# Altium PCB 15W-Dual-Transmitter.PcbDoc
Units mil, origin at the board's own origin, x right, y up, seen from the top; angles counter-clockwise.
Board outline 2362.2 x 1574.8 mil, 2 copper layers (Top Layer, Bottom Layer), stack 61.811 mil thick; 60 components, 45 nets, 203 pads, 210 vias.
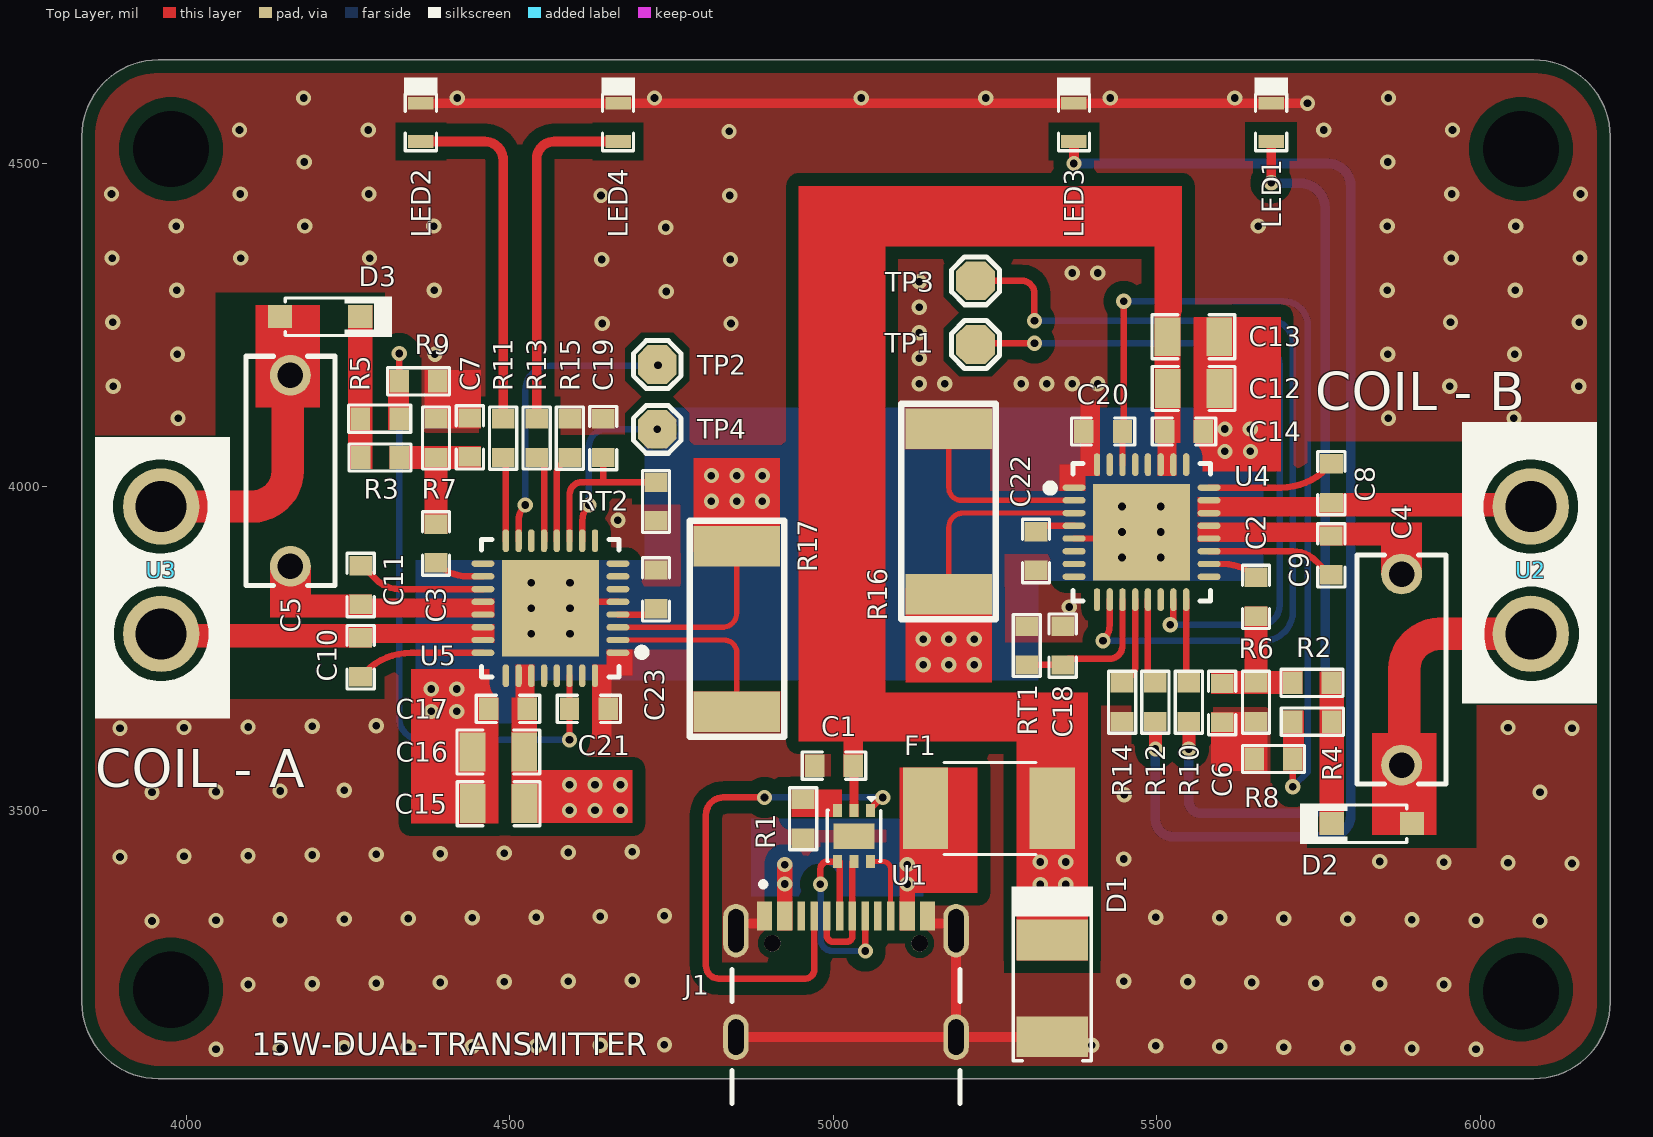
[diagram p0: Top Layer view]
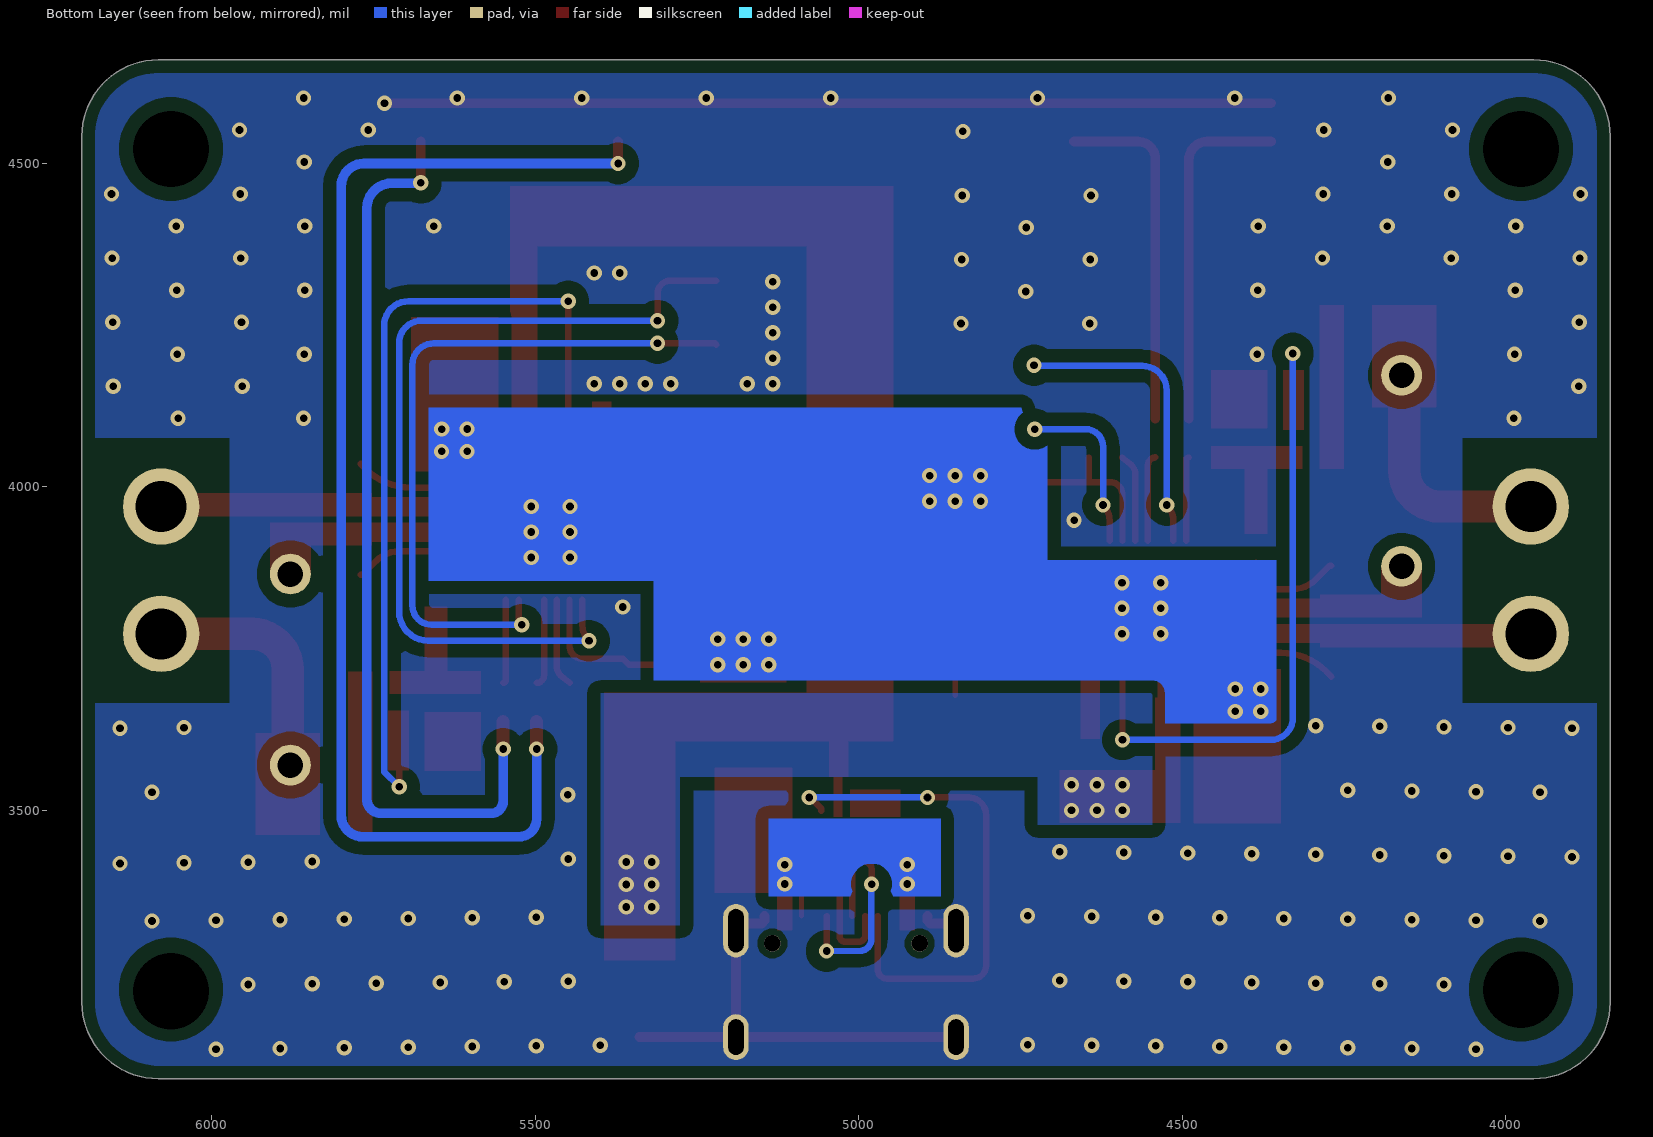
[diagram p1: Bottom Layer view, seen from below]
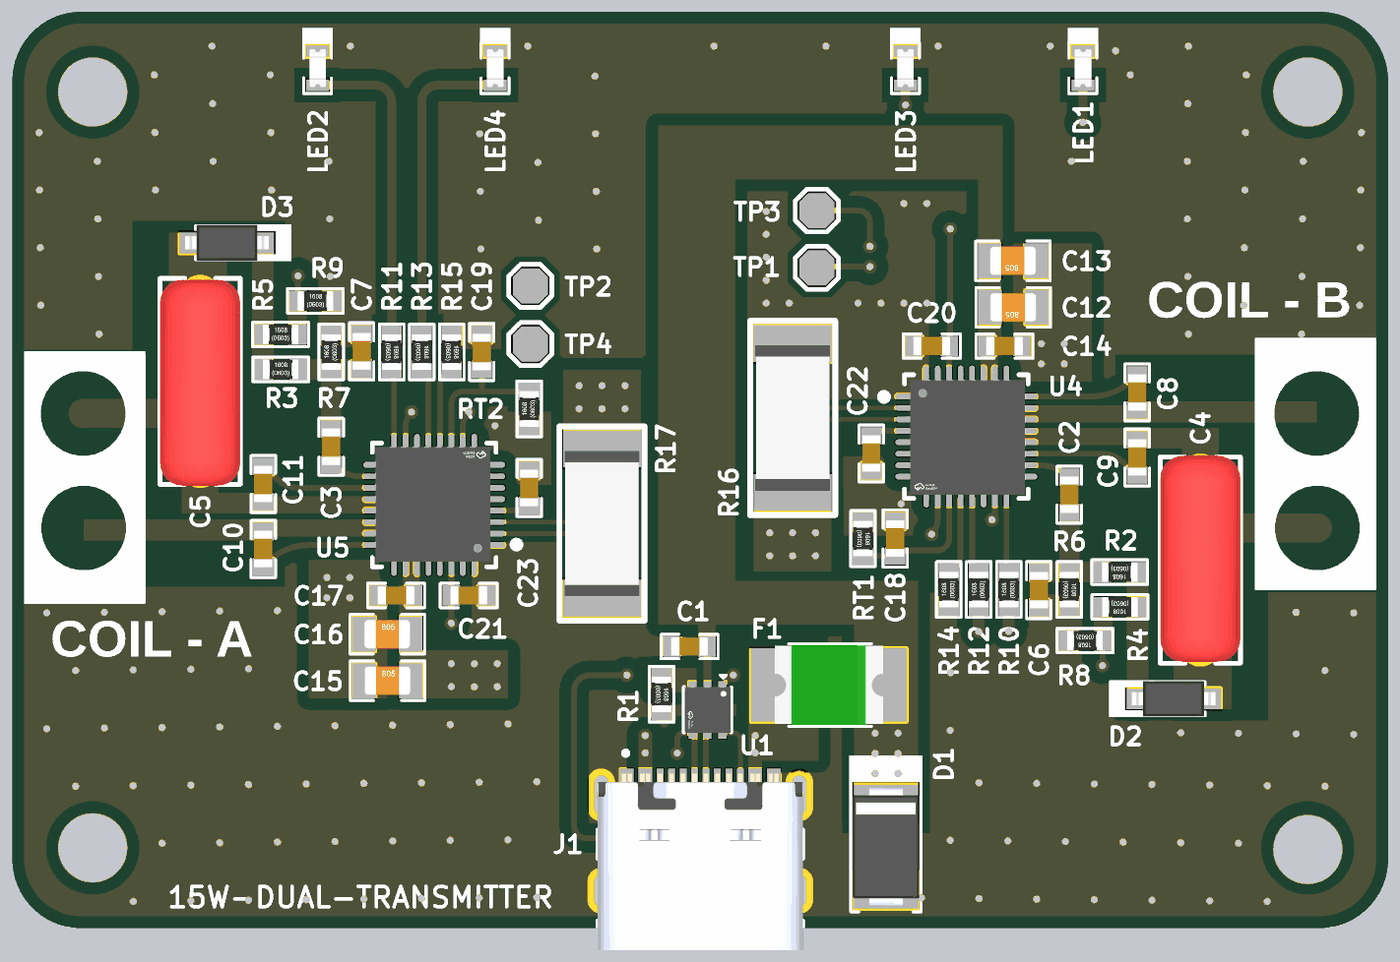
[diagram p2: 3D render of the assembled board from above, using the file's embedded part models]

## Layer stack, top to bottom
Top Solder: solder mask 0.4, Solder Resist, Dk 3.5
Top Layer: signal copper 1.378
Dielectric 1: dielectric 59.055, FR-4, Dk 4.8
Bottom Layer: signal copper 1.378
Bottom Solder: solder mask 0.4, Solder Resist, Dk 3.5

## Board outline
3838.58,3203.4 3838.58,4541.98 cw(c3956.69,4541.98) 3956.69,4660.09 6082.68,4660.09 cw(c6082.68,4541.98) 6200.79,4541.98 6200.79,3203.4 cw(c6082.68,3203.4) 6082.68,3085.29 3956.69,3085.29 cw(c3956.69,3203.4)

## Design rules (kind name [scope] priority, off if disabled: settings)
BoardOutlineClearance [All] p1: gap=0 ignorepadtopadclearanceinfootprint=FALSE except(20: Poly-OutlineEdge)
Clearance Clearance_USB [InDifferentialPairClass('USB_DIFF_Lines')] p1: gap=10 ignorepadtopadclearanceinfootprint=TRUE except(0: Arc-Hole Track-Hole SMDPad-Hole THPad-Hole Via-Hole Fill-Hole Poly-Hole Region-Hole Text-Hole; 7: Arc-Arc Arc-Track Arc-SMDPad Arc-Region Track-Track Track-SMDPad Track-Region SMDPad-Region THPad-Region Via-Region Fill-Region Poly-Region Region-Region; 20: Arc-Poly Track-Poly SMDPad-Poly THPad-Poly Via-Poly Fill-Poly Poly-Poly)
Clearance [All] p2: gap=10 ignorepadtopadclearanceinfootprint=TRUE except(7: Arc-Region Track-Region SMDPad-Fill SMDPad-Region THPad-Region Via-Region Fill-Region Fill-Hole Region-Region Region-Hole; 8: Arc-Track Arc-Via Arc-Fill Track-Track Track-SMDPad Track-Via Track-Fill Track-Hole Fill-Fill; 20: Arc-Poly Track-Poly SMDPad-Poly THPad-Poly Via-Poly Fill-Poly Poly-Poly Poly-Region)
ComponentClearance [All] p1: gap=0 collisioncheckmode=3 verticalgap=0 showdistances=FALSE
DiffPairsRouting [InDifferentialPairClass('USB_DIFF_Lines')] p1: maxlimit=7 minlimit=7 mostfreqgap=7 toplayer_minwidth=10 toplayer_maxwidth=10 toplayer_prefwidth=10 bottomlayer_minwidth=10 bottomlayer_maxwidth=10 bottomlayer_prefwidth=10 impedanceprofiledriven=TRUE impedanceprofileid={637A4964-5C93-4761-ADDB-9B271B462112} impedanceprofilevalue=90.000000 maxuncoupledlength=500
Height [All] p1: minheight=0 maxheight=2000 prefheight=500
HoleSize [All] p1: absolutevalues=TRUE maxlimit=1000 minlimit=1 maxpercent=80.000 minpercent=20.000
MaxMinImpedance "Schematic Impedance Constraint" [InNetClass('USB_DIFF')] p1: minimum=85.00 maximum=95.00
MinimumSolderMaskSliver [All] p1: minsoldermaskwidth=0
PolygonConnect [All] p1: connectstyle=Direct reliefconductorwidth=10 reliefentries=4 polygonreliefangle="90 Angle" airgapwidth=10
RoutingVias [All] p1: holewidth=11.81 width=23.62 viastyle="Through Hole" minholewidth=11.81 minwidth=23.62 maxholewidth=11.81 maxwidth=23.62
SilkToSilkClearance [All] p1: silktosilkclearance=0
SilkToSolderMaskClearance [IsPad] p1: minsilkscreentomaskgap=0 clearancetoexposedcopper=TRUE
SolderMaskExpansion [All] p1: expansion=4 istentingtop=FALSE
SupplyNets "Schematic Supply Nets_2" [InNet('VBUS')] p1: voltage=0.000
SupplyNets "Schematic Supply Nets_8" [InNet('PGND')] p2: voltage=0.000
SupplyNets "Schematic Supply Nets" [InNet('GND')] p3: voltage=0.000
UnRoutedNet [All] p1: checkbadconnections=TRUE
Width [All] p1: maxlimit=50 minlimit=7 preferedwidth=10 minimp=50.000000 maximp=50.000000 favimp=50.000000
22 further rules are at their usual default settings.

## Classes and differential pairs
differential pair class USB_DIFF_Lines: USB_D
net class USB_DIFF: USB_D_N USB_D_P
differential pair USB_D: +USB_D_P -USB_D_N

## Components (designator, comment, footprint, x,y, rotation, side; value= is the part's Value field where it differs from the comment)
C1 "10uF" Cap-0603 5001.12,3569.14 r0 top
C2 "15nF" Cap-0603 5653.42,3830.08 r90 top
C3 "15nF" Cap-0603 4385.94,3912.52 r270 top
C4 "250nF" CAP-TH_L9.0-W3.5-P7.50-D1.0 5808.42,3540.08 r90 top
C5 "250nF" CAP-TH_L9.0-W3.5-P7.50-D1.0 4230.94,4202.52 r270 top
C6 "15nF" Cap-0603 5601.11,3666.09 r90 top
C7 "15nF" Cap-0603 4438.26,4076.5 r270 top
C8 "100nF" Cap-0603 5770,4005.84 r270 top
C9 "100nF" Cap-0603 5769.99,3894.15 r90 top
C10 "100nF" Cap-0603 4269.37,3736.76 r90 top
C11 "100nF" Cap-0603 4269.38,3848.45 r270 top
C12 "22uF" Cap-0805 5557.09,4152.15 r180 top
C13 "22uF" Cap-0805 5556.67,4232.14 r180 top
C14 "100nF" Cap-0603 5542.09,4085.69 r180 top
C15 "22uF" Cap-0805 4482.69,3510.45 r0 top
C16 "22uF" Cap-0805 4482.28,3590.45 r0 top
C17 "100nF" Cap-0603 4497.28,3656.91 r0 top
C18 "15nF" Cap-0603 5354.53,3754.78 r90 top
C19 "15nF" Cap-0603 4644.48,4075.49 r90 top
C20 "2.2nF" Cap-0603 5417.07,4085.69 r0 top
C21 "2.2nF" Cap-0603 4622.3,3656.9 r180 top
C22 "2.2uF" Cap-0603 5313.43,3900.98 r90 top
C23 "2.2uF" Cap-0603 4725.94,3841.61 r270 top
D1 "SMAJ18A" SMA(DO-214AC) 5338.58,3225 r270 top
D2 "1N5819HW-7-F" SOD-123 5832.51,3479.45 r180 top
D3 "1N5819HW-7-F" SOD-123 4206.86,4263.15 r0 top
F1 "BSMD1812-300-24V" Fuse-1812_ 5240.54,3503 r0 top
J1 "USB4105-GF-A" GCT_USB4105-GF-A 5019.69,3149.61 r0 top
LED1 "RED" LED-0603 5676.8,4563.53 r90 top
LED2 "RED" LED-0603 4362.57,4563.53 r90 top
LED3 "Emerald" LED-0603 5371.94,4563.53 r90 top
LED4 "Emerald" LED-0603 4667.43,4563.53 r90 top
R1 "DNP" Res-0603 4953.3,3487.18 r90 top
R2 "3.3K" Res-0603 5739.99,3697.09 r0 top
R3 "3.3K" Res-0603 4299.38,4045.5 r180 top
R4 "100K" Res-0603 5740.49,3637.09 r0 top
R5 "100K" Res-0603 4298.87,4105.5 r180 top
R6 "33K" Res-0603 5653.42,3667.09 r90 top
R7 "33K" Res-0603 4385.94,4075.5 r270 top
R8 "10K" Res-0603 5680.5,3579.45 r0 top
R9 "10K" Res-0603 4358.87,4163.15 r180 top
R10 "1K" Res-0603 5549.54,3667.1 r270 top
R11 "1K" Res-0603 4489.82,4075.5 r90 top
R12 "1K" Res-0603 5497.9,3667.1 r270 top
R13 "1K" Res-0603 4541.46,4075.5 r90 top
R14 "100K" Res-0603 5446.39,3667.1 r270 top
R15 "100K" Res-0603 4592.97,4075.5 r90 top
R16 "20mR" RES-2512 5178.42,3962.13 r90 top
R17 "20mR" RES-2512 4850.94,3780.47 r270 top
RT1 "100K" Res-0603 5299.08,3754.78 r90 top
RT2 "100K" Res-0603 4725.94,3977.52 r270 top
TP1 "TEST POINT" Test-point 5220,4220.08 r0 top
TP2 "TEST POINT" Test-point 4727.94,4189.01 r180 top
TP3 "TEST POINT" Test-point 5220,4318.59 r0 top
TP4 "TEST POINT" Test-point 4727.94,4089.01 r180 top
U1 "HUSB237-AA001-DN06R" DFN-6L-EP(2x2) 5032.09,3460.31 r270 top
U2 "10uH" 760308103102 8578.23,3871.3 r90 top
U3 "10uH" 760308103102 1461.14,3871.3 r270 top
U4 "IP6826" QFN-32_L5.0-W5.0-P0.50-BL-EP3.8 5476.57,3930.08 r270 top
U5 "IP6826" QFN-32_L5.0-W5.0-P0.50-BL-EP3.8 4562.8,3812.52 r90 top

## Footprints (in the part's own frame and the unit in brackets; to place one, negate y for a bottom-side part, rotate by r counter-clockwise, add the part's x,y. Pads: shape width x height; smd on the part's side, far side on the other; paste and mask are expansions set on the pad)
760308103102 [mm] "Wireless Power Transfer Transmitter Coil, body 54.5x54.5mm"
  round 3 hole 2: 1(2.5,63.5) 2(-2.5,63.5)
  silkscreen extent -27.25,-27.25 27.25,27.25, body extent -26.5,-26.5 26.5,66.51, height 3.59
Cap-0603 [mil]
  rect 30x35 smd mask+2.36: 1(-30,0) 2(30,0)
  silkscreen extent -49,-21 49,21, body extent -32,-16 31,16, height 34
Cap-0805 [mil] "SMD 0805"
  rect 40x60 smd mask+2.76: 1(-40,0) 2(40,0)
  silkscreen extent -64,-34 64,34, body extent -39,-25 39,25, height 30
CAP-TH_L9.0-W3.5-P7.50-D1.0 [mm]
  round 1.6 hole 1: 1(0.762,-1.778) 2(8.262,-1.778)
  silkscreen extent 0.01,-3.53 9.01,-0.03, body extent 0.07,-3.53 9.07,-0.03, height 10.6
DFN-6L-EP(2x2) [mm]
  rect 0.5x0.35 smd paste+0 mask+0.051: 1(-1,0.65) 2(-1,0) 3(-1,-0.65) 4(1,-0.65) 5(1,0) 6(1,0.65)
  rect 1x1.6 smd paste+0 mask+0.051: 7(0,0)
  silkscreen extent -1.52,-1.05 1,1.05, body extent -1.01,-1 1.01,1, height 0.82
Fuse-1812_ [mm]
  rect 1.78x3.2 smd: 1(-2.49,0) 2(2.49,0)
  silkscreen extent -1.75,-1.8 1.85,1.8, body extent -2.36,-1.74 2.37,1.74, height 1.03
GCT_USB4105-GF-A [mm]
  rect 0.6x1.15 smd mask+0.05: A1_B12(-3.2,4.755) A4_B9(-2.4,4.755) B1_A12(3.2,4.755) B4_A9(2.4,4.755)
  rect 0.3x1.15 smd mask+0.05: A5(-1.25,4.755) A6(-0.25,4.755) A7(0.25,4.755) A8(1.25,4.755) B5(1.75,4.755) B6(0.75,4.755) B7(-0.75,4.755) B8(-1.75,4.755)
  oval 1x2.1 hole 0.6 slot 1.7 at 90 deg: SH1(-4.32,4.18) SH2(4.32,4.18)
  oval 1x1.8 hole 0.6 slot 1.4 at 90 deg: SH3(-4.32,0) SH4(4.32,0)
  round 0.65 hole 0.65 unplated: ""(-2.89,3.68) ""(2.89,3.68)
  silkscreen extent -4.47,-2.6 4.47,6.1, body extent -4.47,-2.6 4.47,5.11, height 3.31
LED-0603 [mm]
  rect 0.5x1 smd: 1(-0.75,0) 2(0.75,0)
  silkscreen extent -1.12,-0.66 1.75,0.66, body extent -0.82,-0.37 0.82,0.36, height 0.68
QFN-32_L5.0-W5.0-P0.50-BL-EP3.8 [mm]
  oval 0.25x0.9 smd paste-100 mask+0.05: 1(-1.75,-2.65) 2(-1.25,-2.65) 3(-0.749,-2.65) 4(-0.249,-2.65) 5(0.249,-2.65) 6(0.749,-2.65) 7(1.25,-2.65) 8(1.75,-2.65) 17(1.75,2.65) 18(1.25,2.65) 19(0.749,2.65) 20(0.249,2.65) 21(-0.249,2.65) 22(-0.749,2.65) 23(-1.25,2.65) 24(-1.75,2.65)
  oval 0.9x0.25 smd paste-100 mask+0.05: 9(2.65,-1.75) 10(2.65,-1.25) 11(2.65,-0.749) 12(2.65,-0.249) 13(2.65,0.249) 14(2.65,0.749) 15(2.65,1.25) 16(2.65,1.75) 25(-2.65,1.75) 26(-2.65,1.25) 27(-2.65,0.749) 28(-2.65,0.249) 29(-2.65,-0.249) 30(-2.65,-0.749) 31(-2.65,-1.25) 32(-2.65,-1.75)
  rect 3.8x3.8 smd paste-100 mask+0.05: 33(0,0)
  silkscreen extent -2.7,-3.74 2.7,2.7, body extent -2.48,-2.45 2.54,2.57, height 0.86
Res-0603 [mil]
  rect 30x35 smd: 1(-30,0) 2(30,0)
  silkscreen extent -48,-21 48,21, body extent -31,-17 31,17, height 18
RES-2512 [mm]
  rect 1.6x3.4 smd: 1(-3.25,0) 2(3.25,0)
  silkscreen extent -4.24,-1.85 4.24,1.85, body extent -3.17,-1.63 3.18,1.63, height 0.58
SMA(DO-214AC) [mm]
  rect 1.6x2.8 smd: 1(-1.9,0) 2(1.9,0)
  silkscreen extent -3.99,-1.6 2.84,1.6, body extent -2.6,-1.45 2.6,1.45, height 2.3
SOD-123 [mm]
  rect 0.95x0.9 smd: 1(-1.575,0) 2(1.575,0)
  silkscreen extent -1.37,-0.8 2.82,0.8, body extent -1.82,-0.78 1.83,0.78, height 1.5
Test-point [mil]
  oct 60x60 smd: 1(0,0)
  silkscreen extent -37,-37 37,37

## Part data
C1: library part CAP-0603, "GRM188R61E106KA73D"
C2 C3 C6 C7 C18 C19: library part CAP-0603, "CC0402KRX7R9BB153"
C4 C5: library part MPP254J2A0701
C8 C9 C10 C11 C14 C17: library part CAP-0603, "GRM188R71H104KA93D"
C12 C13 C15 C16: library part CAP-0805, "CC0805MKX5R8BB226"
C20 C21: library part CAP-0603, "GRM188R71H222KA01D"
C22 C23: library part CAP-0603, "GRM155R61E225KE11D"
D1: "13.7A 400W 29.2V 20V Unidirectional 18V SMA(DO-214AC) Electrostatic and Surge Protection (TVS/ESD) ROHS", LCSC Part Number=C499735, Manufacturer=SMC, Package=SMA(DO-214AC), ComponentLink1Description=LCSC, ComponentLink1URL=https://www.lcsc.com/product-detail/Electrostatic-and-Surge-Protection-TVS-ESD_SMC-Sangdest-Microelectronicstronic-Nanjing-SMAJ18A_C499735.html, Item Type=TVS/ESD, Manufacturer Part Number=SMAJ18A
D2 D3: "DIODE SCHOTTKY 40V 1A SOD123", Average Rectified Current=1A, Capacitance=110pF, Case/Package=SOD-123-2, Forward Voltage=450mV, LCSC Part Number=C82544, Manufacturer=Diodes, Max Forward Surge Current (Ifsm)=25A, Max Operating Temperature=125°C, Max Power Dissipation=450mW, Max Repetitive Reverse Voltage (Vrrm)=40V, Max Reverse Current=50uA, Min Operating Temperature=-65°C, Package Quantity=3000, Supplier Part Number 1=1N5819HW-FDICT-ND, Category="Schottky Diodes", ComponentLink1Description=https://datasheet.ciiva.com/16303/ds30217-16303296.pdf?src-supplier=Future+Electronics, ComponentLink1URL=https://datasheet.ciiva.com/16303/ds30217-16303296.pdf?src-supplier=Future+Electronics, ComponentLink2Description=https://datasheet.ciiva.com/27092/1538419-27092484.pdf?src-supplier=Jameco, ComponentLink2URL=https://datasheet.ciiva.com/27092/1538419-27092484.pdf?src-supplier=Jameco, ComponentLink3Description=https://datasheet.ciiva.com/912/ds30217-912801.pdf?src-supplier=Digi-Key, ComponentLink3URL=https://datasheet.ciiva.com/912/ds30217-912801.pdf?src-supplier=Digi-Key, ComponentLink4Description=https://datasheet.ciiva.com/1177/ds30217-1177089.pdf?src-supplier=Element14, ComponentLink4URL=https://datasheet.ciiva.com/1177/ds30217-1177089.pdf?src-supplier=Element14, ComponentLink5Description=https://datasheet.ciiva.com/912/ds30217-912802.pdf?src-supplier=Digi-Key, ComponentLink5URL=https://datasheet.ciiva.com/912/ds30217-912802.pdf?src-supplier=Digi-Key, ComponentLink6Description=https://datasheet.ciiva.com/912/ds30217-912803.pdf?src-supplier=Digi-Key, ComponentLink6URL=https://datasheet.ciiva.com/912/ds30217-912803.pdf?src-supplier=Digi-Key, ComponentLink7Description=https://datasheet.ciiva.com/8303/ds30217-8303132.pdf?src-supplier=Avnet, ComponentLink7URL=https://datasheet.ciiva.com/8303/ds30217-8303132.pdf?src-supplier=Avnet, ComponentLink8Description=https://datasheet.ciiva.com/25919/ds30217-25919644.pdf?src-supplier=Avnet+Europe, ComponentLink8URL=https://datasheet.ciiva.com/25919/ds30217-25919644.pdf?src-supplier=Avnet+Europe, Contact Plating=Tin,Matte, Current Rating=1A, Element Configuration=Single, Forward Current=1A, Height=1.25mm, Item Type=Diode, Lead Free="Lead Free", Length=2.85mm, Manufacturer Part Number=1N5819HW-7-F, Max Reverse Voltage (DC)=40V, Number of Pins=2, Output Current=1A, Packaging="Tape and Reel", Peak Non-Repetitive Surge Current=25A, Polarity=Standard, Pricing 1="1=0.46000, 10=0.34500, 100=0.19530, 500=0.12936, 1000=0.09918 (USD)", Radiation Hardening=No, REACH SVHC="No SVHC", RoHS=Yes, RoHS Compliant=Yes, Series=-, Supplier 1=Digi-Key, Termination=SMD/SMT, Voltage Rating (DC)=40V, Weight=0.000353oz, Width=1.7mm
F1: "24V 3A 40A 6A 1812 Resettable Fuses ROHS", LCSC Part Number=C7500481, Manufacturer=BHFUSE, ComponentLink1Description=LCSC, ComponentLink1URL=https://www.lcsc.com/product-detail/Resettable-Fuses_BHFUSE-BSMD1812-300-24V_C7500481.html, Item Type=Fuse, Manufacturer Part Number=BSMD1812-300-24V, RoHS=No, Supplier=LCSC
J1: Package=None, Availability=Unavailable, MF="{'manufacturer': u'GCT'}", MP=USB4105-GF-A, Price=None
LED1 LED2: library part NCD0603R3, "RED LED 0603 Light Emitting Diodes", LCSC Part Number=C3151730, Manufacturer="Foshan NationStar Optoelectronics", Package=0603, ComponentLink1Description=LCSC, ComponentLink1URL=https://www.lcsc.com/product-detail/Light-Emitting-Diodes-LED_Foshan-NationStar-Optoelectronics-NCD0603R3_C3151730.html, Item Type=LED, Manufacturer Part Number=NCD0603R3
LED3 LED4: library part NCD0603G2, "Emerald 0603 Light Emitting Diodes (LED) ROHS", LCSC Part Number=C87326, Manufacturer="Foshan NationStar Optoelectronics", Package=0603, ComponentLink1Description=LCSC, ComponentLink1URL=https://www.lcsc.com/product-detail/Light-Emitting-Diodes-LED_Foshan-NationStar-Optoelectronics-NCD0603G2_C87326.html, Item Type=LED, Manufacturer Part Number=NCD0603G2
R1 R12 R13: library part RES-0603
R2 R3: library part RES-0603, "RC0603FR-073K3L"
R4 R5 R14 R15: library part RES-0603, "RT0603BRD07100KL"
R6 R7: library part RES-0603, "RC0603FR-0733KL"
R8 R9: library part RES-0603, "RC0603FR-0710KL"
R10 R11: library part RES-0603, "RC0603FR-071KL"
R16 R17: library part PA2512FKE7W0R02E, "RES 0.02 OHM 1% 2W 2512", LCSC Part Number=C375689, Manufacturer=Yageo, ComponentLink1Description=https://datasheet.octopart.com/PA2512FKE7W0R02E-Yageo-datasheet-137700559.pdf?src-supplier=Newark, ComponentLink1URL=https://datasheet.octopart.com/PA2512FKE7W0R02E-Yageo-datasheet-137700559.pdf?src-supplier=Newark, Item Type=Resistor, Manufacturer Part Number=PA2512FKE7W0R02E, Pricing="1=0.79, 10=0.514, 25=0.4384, 50=0.3908, 100=0.3503, 250=0.306, 500=0.27824, 1000=0.25464 (USD)", RoHS=No, Stock=3212, Supplier=Digikey
RT1 RT2: library part KNTC0603/100KF3950, "100kΩ 100uA 100mW 3950K ±1% 0603 NTC Thermistors ROHS", LCSC Part Number=C2892545, Manufacturer=KUU, Package=0603, ComponentLink1Description=LCSC, ComponentLink1URL=https://lcsc.com/product-detail/NTC-Thermistors_KUU-KNTC0603-100KF3950_C2892545.html, Item Type="NTC Thermistor", Manufacturer Part Number=KNTC0603/100KF3950
TP1 TP2 TP3 TP4: "Test Point ON", Item Type="TEST POINT"
U1: "DFN-6L-EP(2x2) USB PD ROHS", LCSC Part Number=C22373734, Manufacturer=Hynetek, Package=DFN-6L-EP(2x2), ComponentLink1Description=LCSC, ComponentLink1URL=https://www.lcsc.com/product-detail/USB-PD_Hynetek-HUSB237-AA001-DN06R_C22373734.html, Item Type=IC, Manufacturer Part Number=HUSB237-AA001-DN06R
U2 U3: library part 760308103102, "WE-WPCC Wireless Power Transfer Transmitter Coil, THT, Qi - MP-A2, 10uH, 150W", DC Resistance Max=55mOhm, Manufacturer="Wurth Elektronik", Operating Temperature Max=105°C, Operating Temperature Min=-20°C, Power Capability=150W, Rated Current=7A, Self Resonant Frequency=11MHz, Category="Wireless Power Transmission", Compliance="Qi - MP-A2", ComponentLink1Description="Website Link", ComponentLink1URL=https://www.we-online.com/redexpert/article/760308103102?ad, ComponentLink2Description="Datasheet Link", ComponentLink2URL=https://www.we-online.com/redexpert/spec/760308103102?ad, Height=4.5mm, Inductance=10uH, Length=53, Manufacturer Part Number=760308103102, Match Code=WE-WPCC, Mount="Through Hole", Packaging=Tray, Q Factor=130, Width=53

## Free pads (board coordinates)
  round 0 hole 118.11: 5(3976.38,3223.09) 5(3976.38,4522.3) 5(6062.99,3220.3) 5(6062.99,4522.3)

## Via types
v1: diameter 23.62, hole 11.81, Top Layer to Bottom Layer, tented both sides, 210 vias

## Nets (pads, with @x,y where several pads share a name; then routed paths per layer and width w, separated by ;. In a path a pad name is that pad's centre, name@x,y a point inside that pad or via, vN(x,y) a via of type N, cw(c..) or ccw(c..) an arc to the next point about the centre after c; other vN are vias at no path point)
CC1: J1.A5 U1.1 | length 822.2
  Top Layer w10: v1(4893.7,3520) 4829.92,3520 ccw(c4829.92,3493.23) 4803.15,3493.23 4803.15,3260 ccw(c4823.15,3260) 4823.15,3240 4956.69,3240 ccw(c4956.69,3253.78) 4970.47,3253.78 J1.A5 ; U1.1 5057.68,3502.64 5076.48,3521.44 v1@5076.48,3522.65
  Bottom Layer w10: v1(4893.7,3520) v1(5076.48,3520)
CC2: J1.B5 U1.6 | length 110.1
  Top Layer w8: U1.6 5077.08,3420.94 cw(c5077.08,3409.44) 5088.58,3409.44 J1.B5
GND: C1.1 C6.1 C7.1 C18.2 C19.2 C20.1 C21.1 C22.1 C23.1 D1.2 J1.A1_B12 J1.B1_A12 J1.SH1 J1.SH2 J1.SH3 J1.SH4 LED1.2 LED2.2 LED3.2 LED4.2 R1.1 R6.1 R7.1 R8.1 R9.1 R14.2 R15.2 R16.2 R17.2 RT1.2 RT2.2 U1.7 U4.1 U4.2 U4.32 U5.1 U5.2 U5.32 | length 2672.5
  Top Layer w8: U5.2 4831.24,3763.32 cw(c4831.24,3743.62) 4850.94,3743.62 R17.2@4850.94,3677.52 ; R16.2@5178.42,4065.08 5178.42,3998.98 ccw(c5198.12,3998.98) 5198.12,3979.28 U4.2
  Top Layer w15.33: LED2.2 LED4.2 LED3.2 LED1.2 5733,4593.06 v1(5733,4593) ; J1.SH3 J1.SH4 ; J1.SH1 4849.61,3314.39 4860.71,3325.49 4889.55,3325.49 4893.7,3329.64 J1.A1_B12 ; J1.B1_A12 5145.67,3329.64 5149.82,3325.49 5178.66,3325.49 5189.76,3314.39 J1.SH2 J1.SH4 ; D1.2 5338.58,3149.61 J1.SH4
  other v1: 4046,3131 5993.37,3131 4145,3132 5894.37,3132 4244,3133 5795.37,3133 4343,3134 5696.37,3134 4442,3135 5597.37,3135 4541,3136 5498.37,3136 4640,3137 5399.37,3137 4739,3138 4095.5,3231 5943.87,3231 4194.5,3232 5844.87,3232 4293.5,3233 5745.87,3233 4392.5,3234 5646.87,3234 4491.5,3235 5547.87,3235 4590.5,3236 5448.87,3236 4689.5,3237 3947,3329 6092.37,3329 4046,3330 5993.37,3330 4145,3331 5894.37,3331 4244,3332 5795.37,3332 4343,3333 5696.37,3333 4442,3334 5597.37,3334 4541,3335 5498.37,3335 4640,3336 4739,3337 6141.87,3418 6042.87,3419 5943.87,3420 5844.87,3421 5448.87,3425 3897.5,3428 3996.5,3429 4095.5,3430 4194.5,3431 4293.5,3432 4392.5,3433 4491.5,3434 4590.5,3435 4689.5,3436 5449.87,3524 3947,3528 6092.37,3528 4046,3529 4145,3530 4244,3531 3897.5,3627 6141.87,3627 3996.5,3628 6042.87,3628 4095.5,3629 4194.5,3630 4293.5,3631 5364.75,3814.44 4667.13,3948.58 3987.29,4106.18 5858.08,4106.18 6052.08,4106.18 3887.29,4155.68 5953.08,4155.68 6152.08,4155.68 5133,4159.4 5172.4,4159.4 5290.6,4159.4 5330,4159.4 5369.4,4159.4 5408.8,4159.4 5133,4198.8 3986.29,4205.18 4384.29,4205.18 5857.08,4205.18 6053.08,4205.18 5133,4238.2 4643,4252.5 4842,4252.5 3886.29,4254.68 5954.08,4254.68 6153.08,4254.68 5133,4277.6 4742,4302 3985.29,4304.18 4383.29,4304.18 5856.08,4304.18 6054.08,4304.18 5133,4317 5369.4,4330.75 5408.8,4330.75 4642,4351.5 4841,4351.5 3885.29,4353.68 4084.29,4353.68 4283.29,4353.68 5955.08,4353.68 6154.08,4353.68 4741,4401 3984.29,4403.18 4183.29,4403.18 4382.29,4403.18 5657.08,4403.18 5856.08,4403.18 6055.08,4403.18 4641,4450.5 4840,4450.5 3884.29,4452.68 4083.29,4452.68 4282.29,4452.68 5956.08,4452.68 6155.08,4452.68 4182.29,4502.18 5857.08,4502.18 4839,4549.5 4082.29,4551.68 4281.29,4551.68 5758.08,4551.68 5957.08,4551.68 4181.29,4601.18 4418.78,4601.18 4723.63,4601.18 5043.27,4601.18 5235.71,4601.18 5428.15,4601.18 5620.59,4601.18 5858.08,4601.18
NetC2_1: C2.1 C6.2 R2.1 R6.2
NetC3_1: C3.1 C7.2 R3.1 R7.2
NetC4_1: C4.1 D2.1 U2.2 | length 377.6
  Top Layer w50: C4.1 5880.91,3572.56 5880.91,3581.75 5882.5,3583.34 5882.5,3717.58 cw(c5937.79,3717.58) 5937.79,3772.87 U2.2 U2.2@6079.37,3772.87
NetC4_2: C4.2 C9.2 U4.20 U4.21
NetC5_1: C5.1 D3.1 U3.2 | length 377.6
  Top Layer w50: U3.2@3960,3969.72 U3.2 4101.57,3969.72 ccw(c4101.57,4025.02) 4156.87,4025.02 4156.87,4159.26 4158.46,4160.85 4158.46,4170.03 C5.1
NetC5_2: C5.2 C11.2 U5.20 U5.21
NetC8_1: C8.1 U4.24 | length 200.1
  Top Layer w10: U4.24 5691.72,3998.98 ccw(c5691.72,4098.98) 5762.43,4028.27 C8.1
NetC8_2: C8.2 U2.1 U4.22 U4.23
NetC9_1: C9.1 U4.19 | length 202
  Top Layer w10: U4.19 5709.99,3900.58 cw(c5709.99,3849.7) 5745.97,3885.68 5767.49,3864.15 C9.1
NetC10_1: C10.1 U5.24 | length 200.1
  Top Layer w10: C10.1 4276.94,3714.33 cw(c4347.65,3643.62) 4347.65,3743.62 U5.24
NetC10_2: C10.2 U3.1 U5.22 U5.23
NetC11_1: C11.1 U5.19 | length 202
  Top Layer w10: C11.1 4271.88,3878.45 4293.4,3856.92 ccw(c4329.38,3892.9) 4329.38,3842.02 U5.19
NetC18_1: C18.1 RT1.1 U4.11 | length 234.6
  Top Layer w10: RT1.1 C18.1 5363.89,3734.14 5426.44,3734.14 ccw(c5426.44,3754.78) 5447.07,3754.78 U4.11
NetC19_1: C19.1 RT2.1 U5.11 | length 253.8
  Top Layer w10: U5.11 4592.3,3987.82 cw(c4612,3987.82) 4612,4007.52 4644.48,4007.52 ; C19.1 4644.48,4007.52 ; RT2.1 4644.48,4007.52
NetC22_2: C22.2 U4.4 | length 61.9
  Top Layer w10: C22.2@5310.32,3939.88 U4.4
NetC23_2: C23.2 U5.4 | length 61.9
  Top Layer w10: U5.4 C23.2@4729.05,3802.72
NetD2_2: D2.2 R2.2 R4.2
NetD3_2: D3.2 R3.2 R5.2
NetF1_1: F1.1 J1.A4_B9 J1.B4_A9
  other v1: 4925.2,3386.29 5114.17,3386.29 4925.2,3416.24 5114.17,3416.24
NetLED1_1: LED1.1 R10.2 | length 1440.1
  Top Layer w15: v1(5676.8,4470) LED1.1
  Top Layer w20: v1(5549.54,3595) R10.2
  Bottom Layer w15: v1(5549.54,3595) 5549.54,3514.27 ccw(c5568.41,3514.27) 5568.41,3495.41 5738.19,3495.41 ccw(c5738.19,3517.55) 5760.32,3517.55 5760.32,4430.8 ccw(c5721.69,4430.8) 5755.47,4449.54 ccw(c5721.69,4430.8) 5740.43,4464.58 ccw(c5721.69,4430.8) 5721.69,4469.43 5677.37,4469.43 v1(5676.8,4470)
NetLED2_1: LED2.1 R11.2 | length 543.4
  Top Layer w15: LED2.1 4461,4534 cw(c4461,4505.18) 4489.82,4505.18 R11.2
NetLED3_1: LED3.1 R12.2 | length 1941.5
  Top Layer w15: v1(5371.94,4500) LED3.1
  Top Layer w20: v1@5497.91,3595 R12.2
  Bottom Layer w15: v1(5371.94,4500) 5764.58,4500 cw(c5764.58,4464.58) 5800,4464.58 5800,3492.49 cw(c5766.89,3492.49) 5766.89,3459.38 5524.88,3459.38 cw(c5524.88,3486.35) 5497.91,3486.35 v1(5497.91,3595)
NetLED4_1: LED4.1 R13.2 | length 542.6
  Top Layer w15: R13.2 4541.46,4506.46 cw(c4569,4506.46) 4569,4534 LED4.1
NetR1_2: R1.2 U1.3
NetR10_1: R10.1 U4.16 | length 131
  Top Layer w10: U4.16 5545.47,3701.18 ccw(c5549.55,3701.18) R10.1
NetR11_1: R11.1 U5.16 | length 131
  Top Layer w10: R11.1 cw(c4489.82,4041.42) 4493.9,4041.42 U5.16
NetR12_1: R12.1 U4.13 | length 135.2
  Top Layer w10: U4.13 5486.37,3708.63 ccw(c5497.91,3708.63) R12.1
NetR13_1: R13.1 U5.13 | length 135.2
  Top Layer w10: R13.1 cw(c4541.46,4033.97) 4553,4033.97 U5.13
NetR14_1: R14.1 U4.12 | length 137.3
  Top Layer w10: R14.1 5458.9,3706.75 ccw(c5446.4,3722.84) 5466.77,3722.84 U4.12
NetR15_1: R15.1 U5.12 | length 137.3
  Top Layer w10: U5.12 4572.6,4019.76 cw(c4592.97,4019.76) 4580.47,4035.85 R15.1
NetTP1_1: TP1.1 U4.15 | length 1088.8
  Top Layer w10: TP1.1 5221.92,4222 v1(5311,4222) ; v1(5520.66,3787) 5525.7,3792.03 5525.7,3825.67 U4.15
  Bottom Layer w10: v1(5311,4222) 5656.63,4222 cw(c5656.63,4188.63) 5690,4188.63 5690,3817 cw(c5660,3817) 5660,3787 v1(5520.66,3787)
NetTP2_1: TP2.1 U5.15 | length 461.8
  Top Layer w10: U5.15 4513.6,3947.13 cw(c4548.98,3947.13) v1(4523.96,3972.15)
  Bottom Layer w10: v1(4523.96,3972.15) 4523.96,4149.11 cw(c4562,4149.11) 4562,4187.15 v1@4729,4187.15
  other v1: 4729,4188.15
NetTP3_1: TP3.1 U4.10 | length 1352.9
  Top Layer w10: TP3.1 5291.25,4318.59 cw(c5291.25,4298.83) 5311,4298.83 v1(5311,4257) ; v1@5423.46,3770.94 ccw(c5392.5,3787) 5427.37,3787 U4.10
  Bottom Layer w10: v1(5311,4257) 5675.5,4257 cw(c5675.5,4222) 5710.5,4222 5710.5,3807.5 cw(c5665.19,3807.5) 5665.19,3762.19 v1(5417.01,3762.19)
NetTP4_1: TP4.1 U5.10 | length 270.3
  Top Layer w10: U5.10 4612,3947.13 cw(c4647.38,3947.13) v1(4622.36,3972.15)
  Bottom Layer w10: v1(4622.36,3972.15) 4622.36,4062.51 cw(c4649,4062.51) 4649,4089.15 v1(4728,4089.15) v1@4729,4089.15
PGND: C12.1 C13.1 C14.1 C15.1 C16.1 C17.1 R16.1 R17.1 U4.3 U4.5 U4.33 U5.3 U5.5 U5.33 | length 834.5
  Top Layer w8: U5.33 cw(c4572.6,3812.52) U5.33@4572.6,3822.32 ; U5.3 4828.49,3783.02 ; 4831.24,3783.02 4828.49,3783.02 ; R17.1 4850.94,3805.47 cw(c4828.49,3805.47) 4828.49,3783.02 ; R16.1 5178.42,3937.13 cw(c5200.88,3937.13) 5200.88,3959.58 ; 5198.12,3959.58 5200.88,3959.58 ; U4.3 5200.88,3959.58 ; U4.33@5466.77,3920.28 ccw(c5466.77,3930.08) U4.33
  Top Layer w10: U5.33@4572.6,3822.32 U5.5 ; U4.5 U4.33@5466.77,3920.28
  other v1: 4378.6,3653 4418,3653 4378.6,3687.68 4418,3687.68 5138.9,3725.1 5178.3,3725.1 5217.7,3725.1 5138.9,3764.78 5178.3,3764.78 5217.7,3764.78 4533.3,3772.92 4592.97,3772.92 4533.3,3812.32 4592.97,3812.32 4533.3,3851.72 4592.97,3851.72 5446.4,3890.88 5506.07,3890.88 5446.4,3930.28 5506.07,3930.28 5446.4,3969.68 5506.07,3969.68 4811.67,3977.82 4851.07,3977.82 4890.47,3977.82 4811.67,4017.5 4851.07,4017.5 4890.47,4017.5 5605.36,4054.92 5644.76,4054.92 5605.36,4089.59 5644.59,4089.4
USB_D_N: J1.A7 J1.B7 U1.5 | length 195.3
  Top Layer w10: J1.B7 4990.16,3306.37 ccw(c4999.36,3306.37) 4999.36,3297.18 5021.36,3297.18 ccw(c5021.36,3305.34) 5029.53,3305.34 U1.5@5029.53,3420.94
USB_D_P: J1.A6 J1.B6 U1.4 | length 359.7
  Top Layer w10: v1(4980.15,3386) 4980.15,3409.44 cw(c4991.65,3409.44) 4991.65,3420.94 U1.4 ; J1.A6 U1.4@5009.84,3420.94 ; J1.B6 5049.21,3283.16 v1(5049.68,3282.69)
  Bottom Layer w10: v1(4980.15,3386) 4980.73,3385.42 4980.73,3300.42 ccw(c4998.45,3300.42) 4998.45,3282.69 v1(5049.68,3282.69)
V_DECODE_1: C2.2 U4.18 | length 78.1
  Top Layer w10: U4.18 5603.21,3880.88 cw(c5603.21,3809.86) C2.2
V_DECODE_2: C3.2 U5.18 | length 78.1
  Top Layer w10: C3.2 ccw(c4436.16,3932.74) 4436.16,3861.72 U5.18
V_DET_1: C20.2 R4.1 R8.2 U4.30 | length 1325.1
  Top Layer w10: U4.30 C20.2 5449,4087.62 v1(5449,4287) ; v1(5710.37,3536.45) 5710.5,3536.45 R8.2
  Bottom Layer w10: v1(5449,4287) 5695.78,4287 cw(c5695.78,4249.1) 5733.68,4249.1 5733.68,3559.75 v1(5710.37,3536.45)
V_DET_2: C21.2 R5.1 R9.2 U5.30 | length 988
  Top Layer w10: R9.2 4328.87,4206.15 v1(4329,4206.15) ; v1(4592.3,3609.15) C21.2 U5.30
  Bottom Layer w10: v1(4329,4206.15) 4329,3642.76 ccw(c4362.61,3642.76) 4362.61,3609.15 v1(4592.3,3609.15)
VBUS: C1.2 C12.2 C13.2 C14.2 C15.2 C16.2 C17.2 D1.1 F1.2 U1.2 U4.26 U4.27 U5.26 U5.27
  other v1: 5320,3350.8 5359.4,3350.8 5320,3385.47 5359.4,3385.47 5320,3420.15 5359.4,3420.15 4592.3,3500 4631.7,3500 4671.1,3500 4592.3,3539.68 4631.7,3539.68 4671.1,3539.68
pads on no net: J1. J1.A8 J1.B8 U4.6 U4.7 U4.8 U4.9 U4.14 U4.17 U4.25 U4.28 U4.29 U4.31 U5.6 U5.7 U5.8 U5.9 U5.14 U5.17 U5.25 U5.28 U5.29 U5.31

## Polygon pours and split planes (outlines as drawn)
GND on Bottom Layer "NONET_L-01_P-001" (solid, remove dead copper, pour order 3): 3838.58,3203.4 3838.58,4541.98 cw(c3956.69,4541.98) 3956.69,4660.09 6082.68,4660.09 cw(c6082.68,4541.98) 6200.79,4541.98 6200.79,3203.4 cw(c6082.68,3203.4) 6082.68,3085.29 3956.69,3085.29 cw(c3956.69,3203.4)
VBUS on Bottom Layer "NONET_L-01_P-001" (solid, pour order 0): 4723,3478 4723,3551.64 5276.44,3551.64 5276.44,3322.45 5398.92,3322.45 5398.92,3681 4546.69,3681 4546.69,3478
GND on Top Layer "NONET_L-01_P-001" (solid, remove dead copper, pour order 4): 3838.58,3203.4 3838.58,4541.98 cw(c3956.69,4541.98) 3956.69,4660.09 6082.68,4660.09 cw(c6082.68,4541.98) 6200.79,4541.98 6200.79,3203.4 cw(c6082.68,3203.4) 6082.68,3085.29 3956.69,3085.29 cw(c3956.69,3203.4)

## Other copper
Top Layer:
  region net GND: 4689.64,3748.54 4649.41,3748.54 4649.41,3708.19 4689.64,3708.19
  region net GND: 4657.6,3725.91 4626.77,3725.91 4626.77,3610.6 4657.6,3610.6
  rectangle net GND: 5381.77,4016.69 5412.6,4132
  rectangle net GND: 5349.73,3994.06 5389.96,4034.41
  region net PGND: 5616.67,4262.14 5557.08,4262.14 5557.08,4068.19 5616.67,4068.19
  region net PGND: 4917.87,4044.6 4784.02,4044.6 4784.02,3899.03 4917.87,3899.03
  rectangle net PGND: 5111.5,3698 5245.35,3843.57
  rectangle net VBUS: 5016.12,3551.64 5046.12,3638
  rectangle net VBUS: 4502.69,3480.45 4690,3562.62
  rectangle net GND: 5583.61,3560.94 5670.93,3652.09
  rectangle net VBUS: 5025.2,3489.84 5038.98,3585.31
  rectangle net NetR1_2: 4935.8,3489.84 5013.39,3532.18
  rectangle net NetF1_1: 4913.39,3314.17 4937.01,3416.24
  rectangle net VBUS: 5283.46,3268.31 5393.69,3565.99
  rectangle net NetF1_1: 5102.36,3372.71 5223.15,3565.99
  rectangle net NetF1_1: 5102.36,3314.17 5125.98,3565.99
  region net NetC8_2: 6078.23,3984.2 5563.21,3984.2 5563.21,3954.66 6078.23,3954.66
  region net NetC4_2: 5909.92,3944.8 5563.21,3944.8 5563.21,3915.26 5909.92,3915.26
  region net NetC4_2: 5909.92,3944.8 5846.93,3944.8 5846.93,3865.35 5909.92,3865.35
  region net NetD2_2: 5789.2,3714.59 5751.8,3714.59 5751.8,3461.73 5789.2,3461.73
  region net V_DET_1: 5727.37,3654.59 5695.5,3654.59 5695.5,3561.95 5727.37,3561.95
  region net NetC2_1: 5724.99,3715.09 5583.61,3715.09 5583.61,3679.59 5724.99,3679.59
  region net NetC2_1: 5670.93,3815.08 5635.93,3815.08 5635.93,3697.09 5670.93,3697.09
  region net PGND: 5616.68,4262.15 5557.09,4262.15 5557.09,4068.19 5616.68,4068.19
  region net VBUS: 5536.68,4262.15 5497.09,4262.15 5497.09,4068.19 5536.68,4068.19
  region net VBUS: 5501.15,4262.15 5501.15,4016.71 5530.7,4016.71 5530.7,4262.15
  region net NetC4_1: 5932.37,3619.59 5832.51,3619.59 5832.51,3461.73 5932.37,3461.73
  region net NetC8_2: 6078.23,3990.84 5752.5,3990.84 5752.5,3960.84 6078.23,3960.84
  region net NetC4_2: 5868.37,3933.45 5752.49,3933.45 5752.49,3909.15 5868.37,3909.15
  rectangle net NetC5_2: 4171,3809.15 4286.88,3833.45
  rectangle net NetC10_2: 3961.14,3751.76 4286.87,3781.76
  rectangle net NetC5_1: 4107,4123 4206.86,4280.87
  region net VBUS: 4538.22,3480.45 4538.22,3725.89 4508.67,3725.89 4508.67,3480.45
  rectangle net VBUS: 4502.69,3480.45 4542.28,3674.41
  rectangle net PGND: 4422.69,3480.45 4482.28,3674.41
  rectangle net NetC3_1: 4368.44,3927.52 4403.44,4045.5
  rectangle net NetC3_1: 4314.38,4027.5 4455.76,4063
  rectangle net GND: 4368.44,4090.5 4455.76,4180.65
  rectangle net V_DET_2: 4312,4088 4343.87,4180.65
  rectangle net NetD3_2: 4250.17,4028 4287.57,4280.87
  rectangle net NetC5_2: 4129.45,3797.8 4192.44,3877.24
  rectangle net NetC5_2: 4129.45,3797.8 4476.16,3827.34
  rectangle net NetC10_2: 3961.14,3758.4 4476.16,3787.94
  pour cut-out: 5394.26,3895.98 5394.26,3994.06 5242.5,3994.06 5242.5,4058.58 5100.39,4058.58 5100.39,3856.26 5265.35,3856.26 5265.35,3895.98
  pour cut-out: 4044.38,4300.87 4044.38,4079.72 3838.58,4079.72 3838.58,3671.76 4250.17,3671.76 4250.17,4300.87
  pour cut-out: 5994.99,3441.73 5994.99,3662.88 6200.79,3662.88 6200.79,4070.84 5789.2,4070.84 5789.2,3441.73
  region net PGND: 5570.88,4047.2 5568.94,4056.92 5563.44,4065.17 5557.08,4069.41 5557.08,4102.14 5557.08,4202.14 5557.08,4262.14 5691.71,4262.14 5691.71,4024.47 5570.88,4024.47
  region net PGND: 4468.49,3695.39 4470.42,3685.67 4475.93,3677.43 4482.28,3673.18 4482.28,3640.45 4482.28,3540.45 4482.28,3480.45 4347.65,3480.45 4347.65,3718.12 4468.49,3718.12
  pour cut-out: 4645.11,3748.54 4645.11,3793 4764.02,3793 4764.02,3883.63 4927.6,3883.63 4927.6,3684.02 4777.94,3684.02 4777.94,3748.54
  region net VBUS: 5539,4271.07 5538.25,4269.95 5536.7,4262.15 5536.7,4070.87 5535.75,4070.68 5532.03,4068.19 5499.82,4068.19 5496.67,4070.29 5496.67,4372 5080,4372 5080,3682.1 5393.69,3682.1 5393.69,3565.99 5393.69,3268.31 5283.46,3268.31 5283.46,3607 4947,3607 4947,4465 5539,4465
Bottom Layer:
  pour cut-out: 5972,3666 5972,4076 6200.79,4076 6200.79,3666
  pour cut-out: 4067.37,3666 4067.37,4076 3838.58,4076 3838.58,3666
  region net PGND: 5316.58,3701.39 5316.58,3855.28 5664.51,3855.28 5664.51,4122 4748.72,4122 4746.85,4115 4747.53,4114.6 4753.46,4108.68 4757.64,4101.43 4759.81,4093.34 4759.81,4084.96 4757.64,4076.87 4753.46,4069.62 4747.53,4063.69 4740.28,4059.51 4732.19,4057.34 4723.81,4057.34 4715.72,4059.51 4708.53,4063.66 4708.53,3887.04 4354.49,3887.04 4354.49,3642.76 4354.42,3642.39 4354.97,3639.59 4356.76,3636.91 4359.45,3635.12 4362.24,3634.56 4362.61,3634.64 4526.3,3634.64 4526.3,3681 4527.85,3688.8 4532.27,3695.42 4538.89,3699.84 4546.69,3701.39
  region net NetF1_1: 5139.15,3367.68 5013.31,3367.68 5010.05,3374.68 5011.96,3381.81 5011.96,3390.19 5009.79,3398.28 5005.6,3405.53 4999.68,3411.45 4992.43,3415.64 4984.34,3417.81 4975.96,3417.81 4967.87,3415.64 4960.62,3411.45 4954.69,3405.53 4950.51,3398.28 4948.34,3390.19 4948.34,3381.81 4950.25,3374.68 4946.99,3367.68 4873.28,3367.68 4873.15,3367.78 4873.15,3487.18 5139.15,3487.18
Multi-Layer:
  pour cut-out: 3976.38,4442.42 cw(c3976.38,4522.3) 3896.5,4522.3 cw(c3976.38,4522.3) 3976.38,4602.18 cw(c3976.38,4522.3) 4056.25,4522.3 cw(c3976.38,4522.3)
  pour cut-out: 6062.99,4442.42 cw(c6062.99,4522.3) 5983.12,4522.3 cw(c6062.99,4522.3) 6062.99,4602.18 cw(c6062.99,4522.3) 6142.87,4522.3 cw(c6062.99,4522.3)
  pour cut-out: 6062.99,3143.21 cw(c6062.99,3223.09) 5983.12,3223.09 cw(c6062.99,3223.09) 6062.99,3302.96 cw(c6062.99,3223.09) 6142.87,3223.09 cw(c6062.99,3223.09)
  pour cut-out: 3976.38,3143.21 cw(c3976.38,3223.09) 3896.5,3223.09 cw(c3976.38,3223.09) 3976.38,3302.96 cw(c3976.38,3223.09) 4056.25,3223.09 cw(c3976.38,3223.09)

## Silkscreen, mask and mechanical layers (free items; w line width, h text height)
Top Overlay:
  region: 3859,4076.6 4067.23,4076.6 4067.23,3642.6 3859,3642.6 hole: 3953.85,3700.26 3968.15,3700.26 3982.18,3703.05 3995.4,3708.52 4007.29,3716.47 4017.4,3726.58 4025.35,3738.48 4030.82,3751.69 4033.61,3765.72 4033.61,3772.87 4033.61,3780.03 4030.82,3794.06 4025.35,3807.27 4017.4,3819.16 4007.29,3829.28 3995.4,3837.22 3982.18,3842.7 3968.15,3845.49 3953.85,3845.49 3939.82,3842.7 3926.6,3837.22 3914.71,3829.28 3904.6,3819.16 3896.65,3807.27 3891.18,3794.06 3888.39,3780.03 3888.39,3772.87 3888.39,3765.72 3891.18,3751.69 3896.65,3738.48 3904.6,3726.58 3914.71,3716.47 3926.6,3708.52 3939.82,3703.05 hole: 3952.71,3897.11 3967.01,3897.11 3981.04,3899.9 3994.25,3905.37 4006.15,3913.32 4016.26,3923.44 4024.21,3935.33 4029.68,3948.54 4032.47,3962.57 4032.47,3969.72 4032.47,3976.88 4029.68,3990.91 4024.21,4004.12 4016.26,4016.01 4006.15,4026.13 3994.25,4034.07 3981.04,4039.55 3967.01,4042.34 3952.71,4042.34 3938.68,4039.55 3925.46,4034.07 3913.57,4026.13 3903.45,4016.01 3895.51,4004.12 3890.03,3990.91 3887.24,3976.88 3887.24,3969.72 3887.24,3962.57 3890.03,3948.54 3895.51,3935.33 3903.45,3923.44 3913.57,3913.32 3925.46,3905.37 3938.68,3899.9
  region: 6180.4,3666 5972,3666 5972,4100 6180.4,4100 hole: 6085.38,4042.34 6071.08,4042.34 6057.05,4039.55 6043.83,4034.07 6031.94,4026.13 6021.82,4016.01 6013.88,4004.12 6008.4,3990.91 6005.61,3976.88 6005.61,3969.72 6005.61,3962.57 6008.4,3948.54 6013.88,3935.33 6021.82,3923.43 6031.94,3913.32 6043.83,3905.37 6057.05,3899.9 6071.08,3897.11 6085.38,3897.11 6099.41,3899.9 6112.62,3905.37 6124.52,3913.32 6134.63,3923.43 6142.58,3935.33 6148.05,3948.54 6150.84,3962.57 6150.84,3969.72 6150.84,3976.88 6148.05,3990.91 6142.58,4004.12 6134.63,4016.01 6124.52,4026.13 6112.62,4034.07 6099.41,4039.55 hole: 6086.52,3845.49 6072.22,3845.49 6058.19,3842.7 6044.97,3837.22 6033.08,3829.28 6022.97,3819.16 6015.02,3807.27 6009.55,3794.05 6006.75,3780.03 6006.75,3772.87 6006.75,3765.72 6009.55,3751.69 6015.02,3738.48 6022.97,3726.58 6033.08,3716.47 6044.97,3708.52 6058.19,3703.05 6072.22,3700.26 6086.52,3700.26 6100.55,3703.05 6113.77,3708.52 6125.66,3716.47 6135.77,3726.58 6143.72,3738.48 6149.19,3751.69 6151.98,3765.72 6151.98,3772.87 6151.98,3780.03 6149.19,3794.05 6143.72,3807.27 6135.77,3819.16 6125.66,3829.28 6113.77,3837.22 6100.55,3842.7
  text "COIL - B" at 5744.82,4099.39 h100
  text "COIL - A" at 3859,3516.79 h100
  text "15W-DUAL-TRANSMITTER" at 4101.5,3121.57 h35
Board Outline:
  the board outline again, w10

## Dimensions
3838.58,4541.98 to 6200.79,4541.98 on Dimension
3956.69,4660.09 to 3956.69,3085.29 on Dimension

## Text inside footprints (layer, text, board x,y; h text height)
J1: Mechanical 13 "PCB EDGE" at 5232.28,3051.18 h16